# EAGLE board semafor-c-panel (EAGLE 9.2.2)
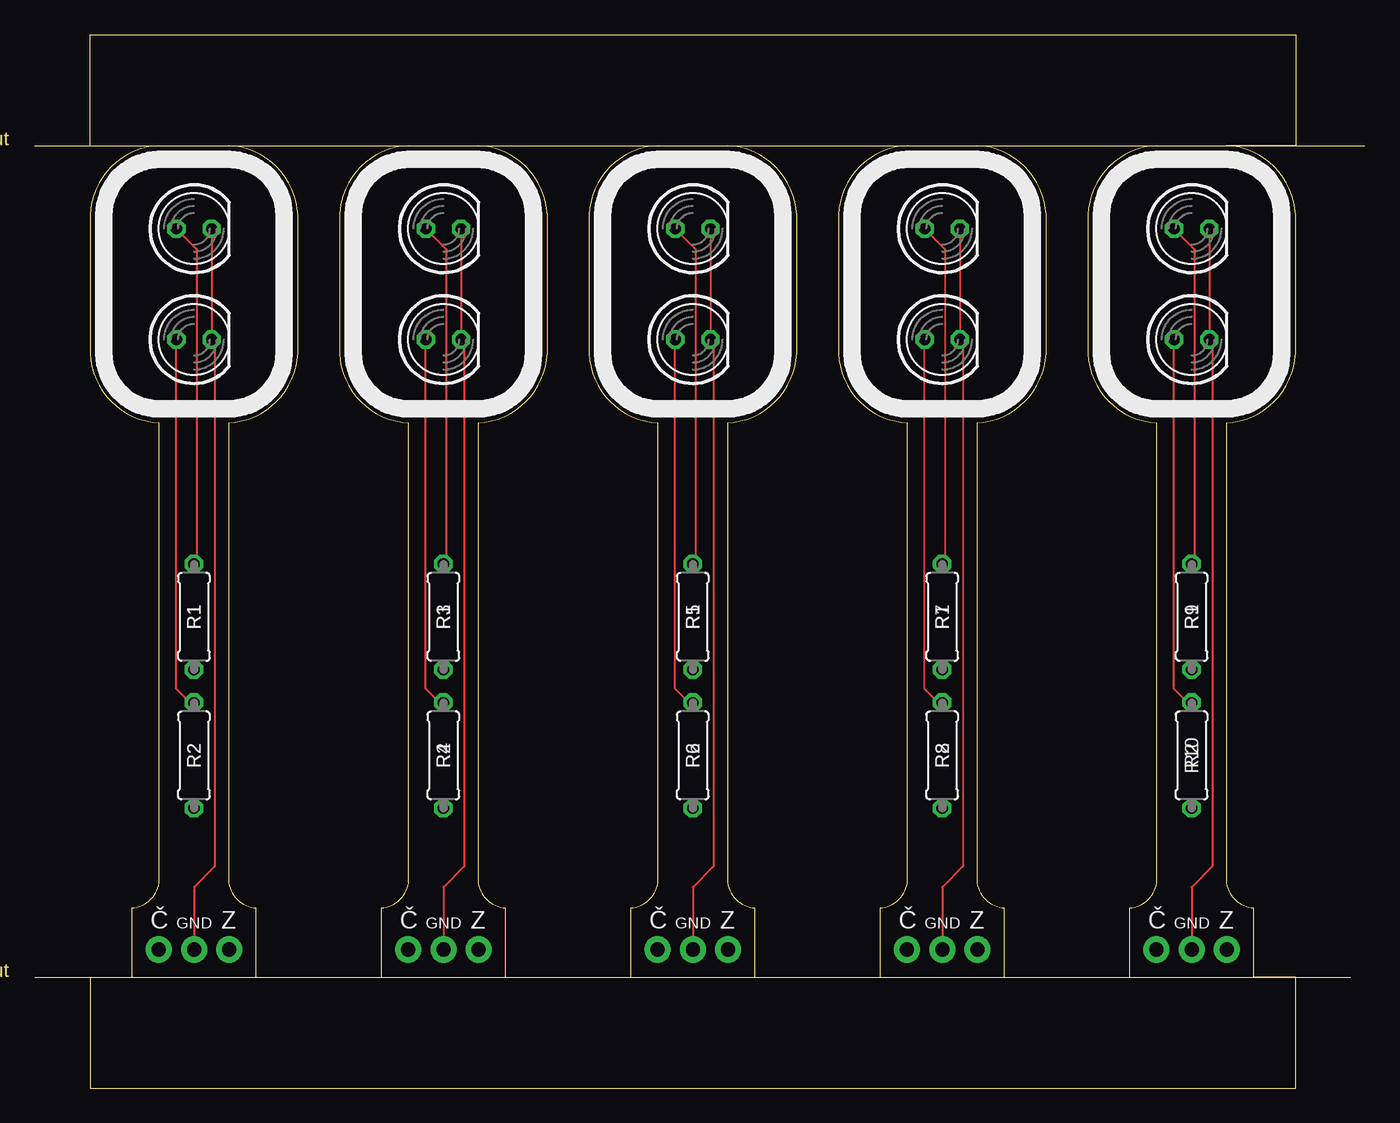
[diagram p0: board, top side]
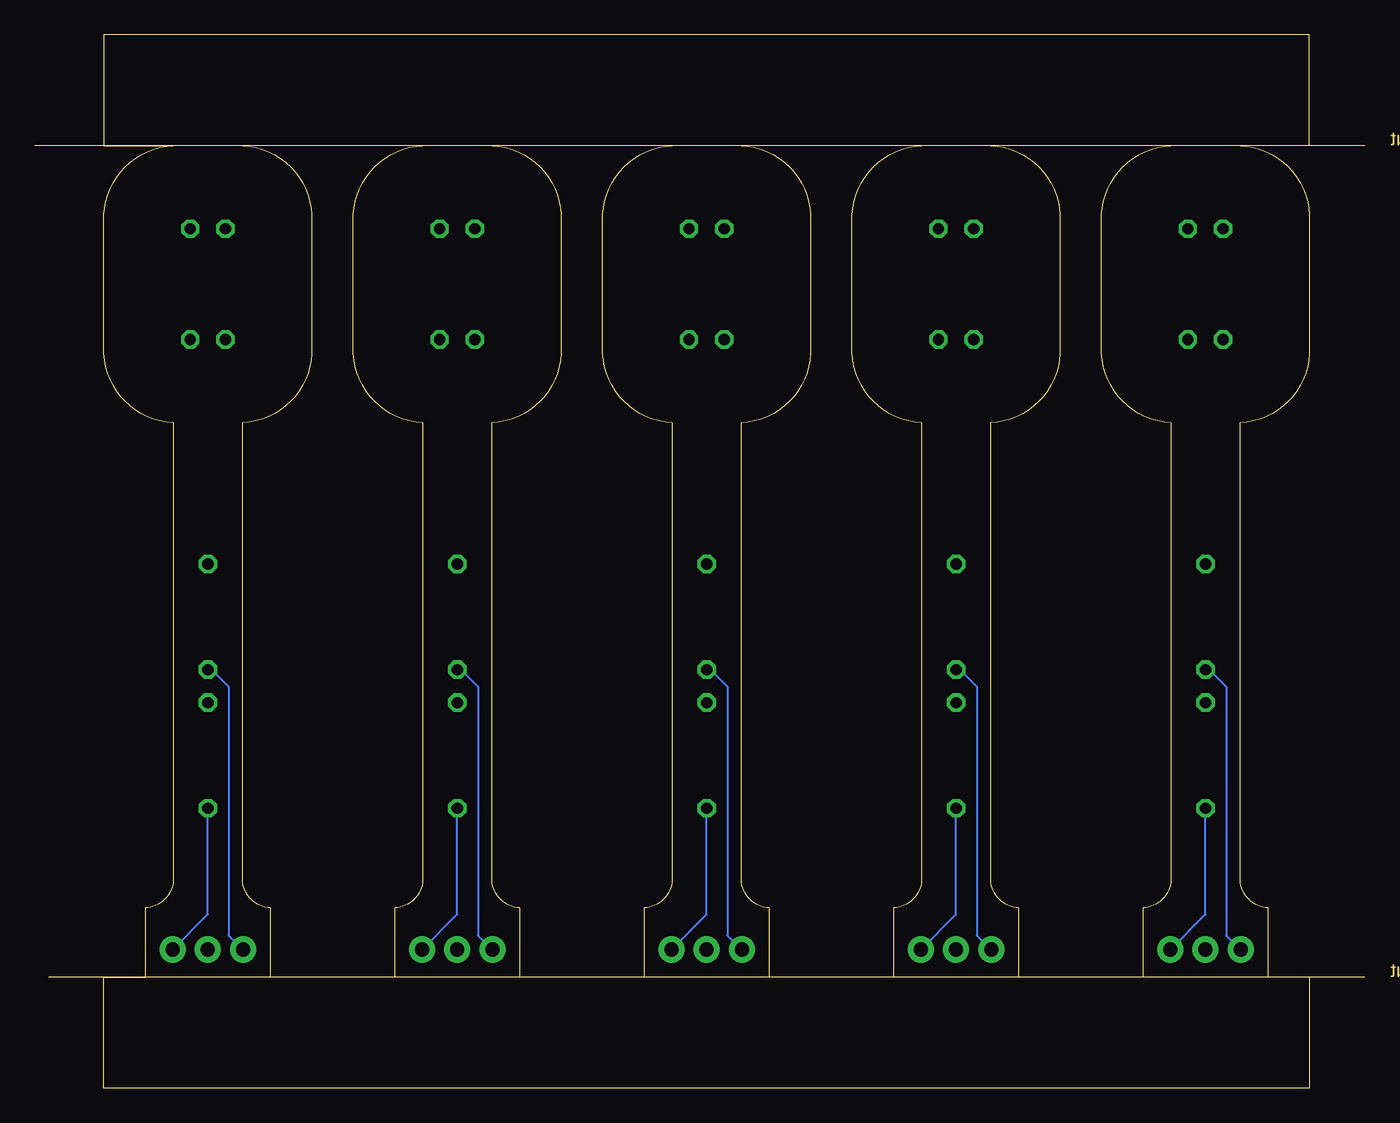
[diagram p1: board, bottom side, seen from below]

Size 96 x 76 mm. Coordinates in mm from the lower left corner, seen from the top.
Outline: 0,68 96,68
Outline: 0,8 95,8
Outline: 16,8 16,13 arc-84 14,15 14,48 arc84 19,53 19,63 arc84 14,68 27,68 arc84 22,63 22,53 arc84 27,48 27,15 arc-84 25,13 25,8 16,8
Outline: 4,63 4,53 arc84 9,48 9,15 arc-84 7,13 7,8 4,8 4,0 91,0 91,8 88,8 88,13 arc-84 86,15 86,48 arc84 91,53 91,63 arc84 86,68 91,68 91,76 4,76 4,68 9,68 arc84 4,63
Outline: 34,8 34,13 arc-84 32,15 32,48 arc84 37,53 37,63 arc84 32,68 45,68 arc84 40,63 40,53 arc84 45,48 45,15 arc-84 43,13 43,8 34,8
Outline: 52,8 52,13 arc-84 50,15 50,48 arc84 55,53 55,63 arc84 50,68 63,68 arc84 58,63 58,53 arc84 63,48 63,15 arc-84 61,13 61,8 52,8
Outline: 70,8 70,13 arc-84 68,15 68,48 arc84 73,53 73,63 arc84 68,68 81,68 arc84 76,63 76,53 arc84 81,48 81,15 arc-84 79,13 79,8 70,8
Copper layers (1*16): Top 0.035mm / dielectric 1.5mm / Bottom 0.035mm
Design rules "SeeedStudio_2layer_DRU_no_angle_20140221": minimum track width 6mil, minimum drill 12mil, track to track 6mil, track to pad 6mil, pad to pad 6mil, via to via 6mil, smd to smd 0mil, copper to edge 10mil, drill to drill 10mil, minimum pad ring 10mil, minimum via ring 6mil, stop-mask expansion 2mil, vias tented up to drill 100mil, thermal gap 10mil

## Footprints (pad centres in the part's own frame; a part is rotated, then mirrored left to right if it is on the bottom)
1X03_NO_SILK = drill 1.016 pad 1.88: 1 0,0; 2 2.54,0; 3 5.08,0
LED5MM = drill 0.813 octagon: A -1.27,0; K 1.27,0
0207/7 = drill 0.813 octagon: 1 -3.81,0; 2 3.81,0

## Placement (x,y rotation side)
J1  [1X03_NO_SILK]  14.04,10 180 top
J2  [1X03_NO_SILK]  32.04,10 180 top
J3  [1X03_NO_SILK]  50.04,10 180 top
J4  [1X03_NO_SILK]  68.04,10 180 top
J5  [1X03_NO_SILK]  86.04,10 180 top
LED1  [LED5MM]  11.5,62 0 top
LED2  [LED5MM]  11.5,54 0 top
LED3  [LED5MM]  29.5,62 0 top
LED4  [LED5MM]  29.5,54 0 top
LED5  [LED5MM]  47.5,62 0 top
LED6  [LED5MM]  47.5,54 0 top
LED7  [LED5MM]  65.5,62 0 top
LED8  [LED5MM]  65.5,54 0 top
LED9  [LED5MM]  83.5,62 0 top
LED10  [LED5MM]  83.5,54 0 top
R1  [0207/7]  11.5,34 90 top
R2  [0207/7]  11.5,24 90 top
R3  [0207/7]  29.5,34 90 top
R4  [0207/7]  29.5,24 90 top
R5  [0207/7]  47.5,34 90 top
R6  [0207/7]  47.5,24 90 top
R7  [0207/7]  65.5,34 90 top
R8  [0207/7]  65.5,24 90 top
R9  [0207/7]  83.5,34 90 top
R10  [0207/7]  83.5,24 90 top

## Library data of the parts
J1-J5 = SparkFun-Connectors
LED1-LED10 = led
R1-R10 = rcl; SPICEPREFIX: R

## Nets
N$1: LED2.A R2.2
N$2: J2.2 LED3.K LED4.K
N$3: LED1.A R1.2
N$4: J1.2 LED1.K LED2.K
N$5: J1.3 R1.1
N$6: J1.1 R2.1
N$7: J2.3 R3.1
N$8: J2.1 R4.1
N$9: LED4.A R4.2
N$10: LED3.A R3.2
N$11: J3.2 LED5.K LED6.K
N$12: J3.3 R5.1
N$13: J3.1 R6.1
N$14: LED6.A R6.2
N$15: LED5.A R5.2
N$16: J4.2 LED7.K LED8.K
N$17: J4.3 R7.1
N$18: J4.1 R8.1
N$19: LED8.A R8.2
N$20: LED7.A R7.2
N$21: J5.2 LED9.K LED10.K
N$22: J5.3 R9.1
N$23: J5.1 R10.1
N$24: LED10.A R10.2
N$25: LED9.A R9.2

## Tracks (layer width: path | path; a pad name or v marks a point on that pad's centre or on a via)
N$1
  Top 0.152: LED2.A 10.23,53.93 10.2,53.97 10.2,28.84 11.23,27.81 R2.2
N$2
  Top 0.152: J2.2 29.5,14.5 31,16 31,54.01 30.77,53.77 LED4.K LED3.K
N$3
  Top 0.152: LED1.A 11.7,60.53 11.7,37.81 R1.2
N$4
  Top 0.152: J1.2 11.5,14.5 13,16 13,54.01 12.77,53.77 LED2.K LED1.K
N$5
  Bottom 0.152: R1.1 11.23,30.19 10,28.96 10,11 9,10 J1.3
N$6
  Bottom 0.152: R2.1 11.5,12.54 J1.1
N$7
  Bottom 0.152: R3.1 29.23,30.19 28,28.96 28,11 27,10 J2.3
N$8
  Bottom 0.152: R4.1 29.5,12.54 J2.1
N$9
  Top 0.152: LED4.A 28.23,53.93 28.2,53.97 28.2,28.84 29.23,27.81 R4.2
N$10
  Top 0.152: LED3.A 29.7,60.53 29.7,37.81 R3.2
N$11
  Top 0.152: J3.2 47.5,14.5 49,16 49,54.01 48.77,53.77 LED6.K LED5.K
N$12
  Bottom 0.152: R5.1 47.23,30.19 46,28.96 46,11 45,10 J3.3
N$13
  Bottom 0.152: R6.1 47.5,12.54 J3.1
N$14
  Top 0.152: LED6.A 46.23,53.93 46.2,53.97 46.2,28.84 47.23,27.81 R6.2
N$15
  Top 0.152: LED5.A 47.7,60.53 47.7,37.81 R5.2
N$16
  Top 0.152: J4.2 65.5,14.5 67,16 67,54.01 66.77,53.77 LED8.K LED7.K
N$17
  Bottom 0.152: R7.1 65.23,30.19 64,28.96 64,11 63,10 J4.3
N$18
  Bottom 0.152: R8.1 65.5,12.54 J4.1
N$19
  Top 0.152: LED8.A 64.23,53.93 64.19,53.97 64.19,28.84 65.23,27.81 R8.2
N$20
  Top 0.152: LED7.A 65.7,60.53 65.7,37.81 R7.2
N$21
  Top 0.152: J5.2 83.5,14.5 85,16 85,54.01 84.77,53.77 LED10.K LED9.K
N$22
  Bottom 0.152: R9.1 83.23,30.19 82,28.96 82,11 81,10 J5.3
N$23
  Bottom 0.152: R10.1 83.5,12.54 J5.1
N$24
  Top 0.152: LED10.A 82.23,53.93 82.19,53.97 82.19,28.84 83.23,27.81 R10.2
N$25
  Top 0.152: LED9.A 83.7,60.53 83.7,37.81 R9.2

## Text on the board
Dimension: v-cut | v-cut
tPlace: Č | GND | Z | Č | GND | Z | Č | GND | Z | Č | GND | Z | Č | GND | Z
_tNames: R1 | R1 | R1 | R1 | R1 | R2 | R2 | R2 | R2 | R2